# Altium PCB PCB1.PcbDoc
Units mm, origin at the board's own origin, x right, y up, seen from the top; angles counter-clockwise.
Board outline 40.39 x 54.1 mm, 2 copper layers (Top Layer, Bottom Layer); 13 components, 16 nets, 48 pads, 0 vias.
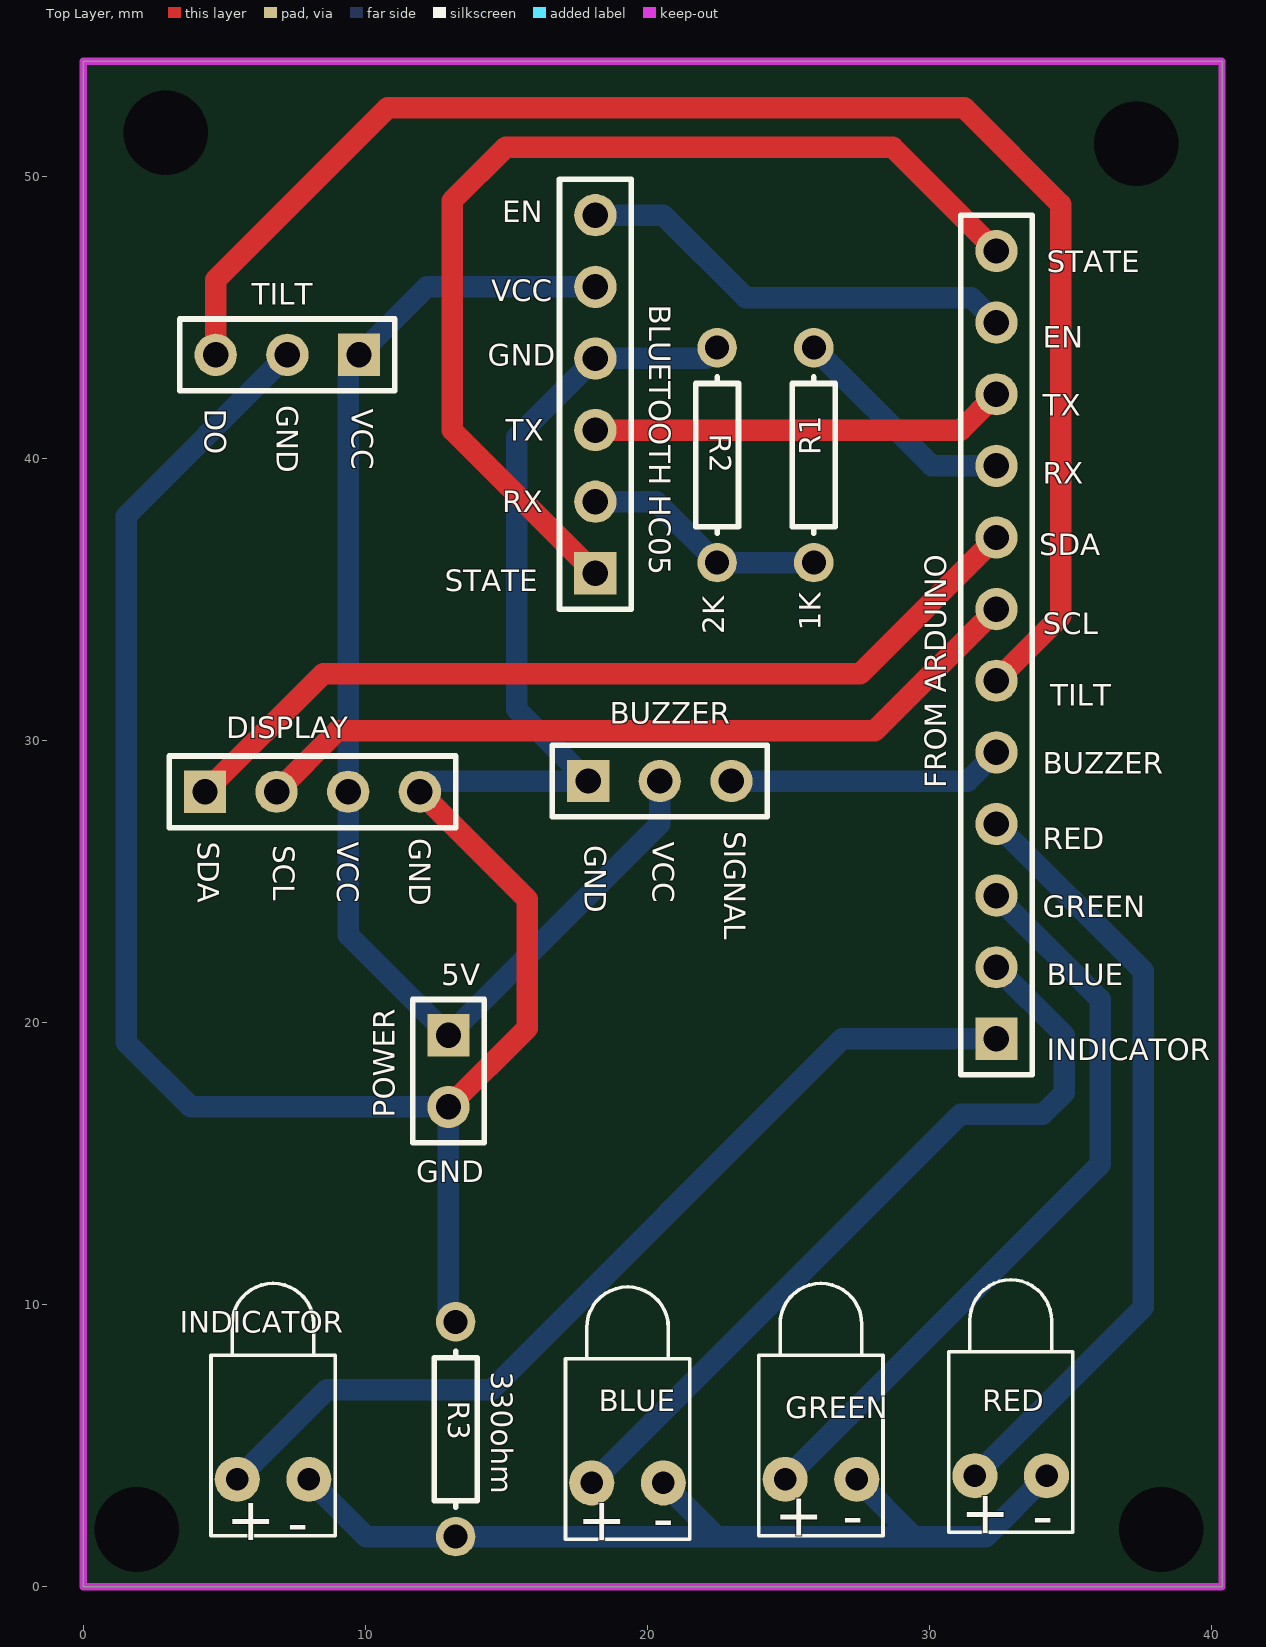
[diagram p0: Top Layer view]
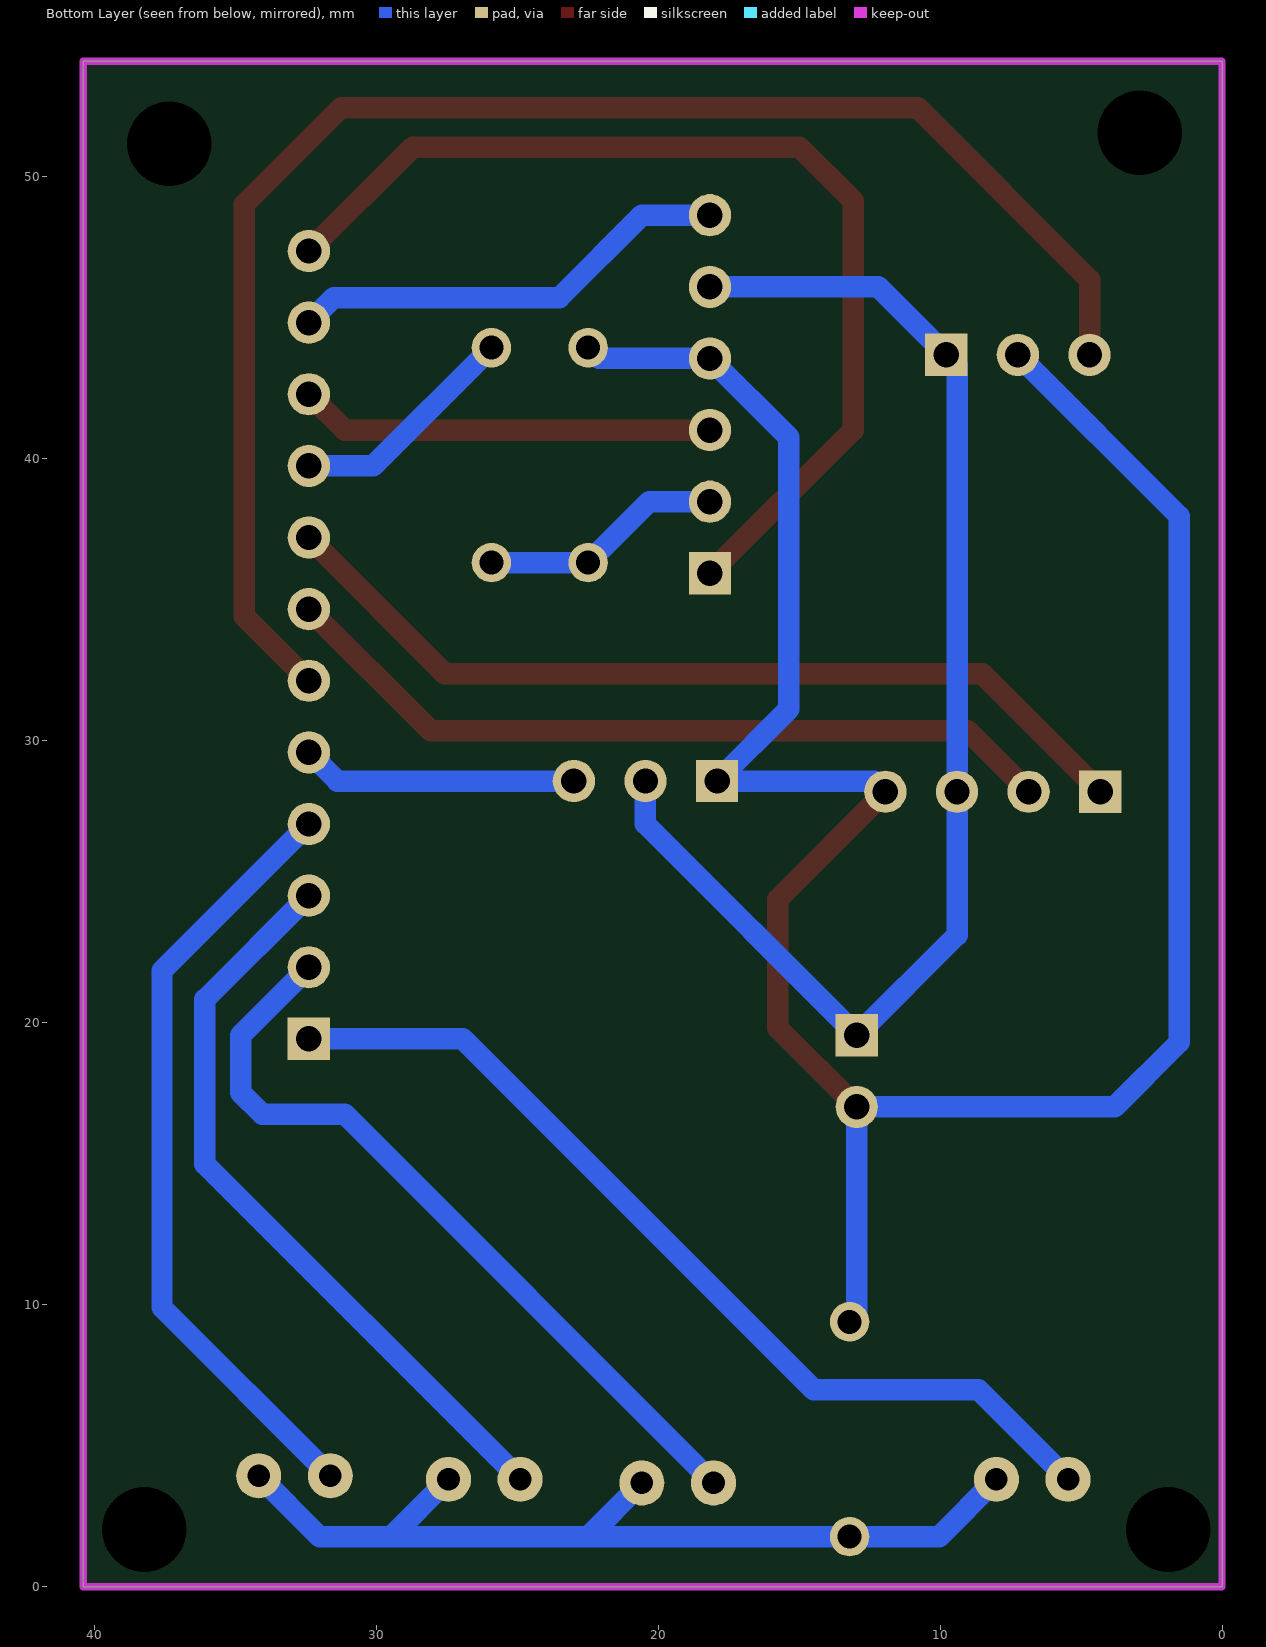
[diagram p1: Bottom Layer view, seen from below]

## Layer stack, top to bottom
Top Solder: solder mask 0.0102, Solder Resist, Dk 3.5
Top Layer: signal copper 0.0356
Dielectric 1: dielectric 0.32, FR-4, Dk 4.8
Bottom Layer: signal copper 0.0356
Bottom Solder: solder mask 0.0102, Solder Resist, Dk 3.5

## Board outline
0,0 40.386,0 40.386,54.102 0,54.102

## Design rules (kind name [scope] priority, off if disabled: settings)
Clearance [All] p1: gap=0.254 ignorepadtopadclearanceinfootprint=FALSE except(0: Arc-Hole Track-Hole SMDPad-Hole THPad-Hole Via-Hole Fill-Hole Poly-Hole Region-Hole Text-Hole)
PolygonConnect [All] p1: connectstyle=Relief reliefconductorwidth=0.254 reliefentries=4 polygonreliefangle="90 Angle" airgapwidth=0.254
RoutingVias [All] p1: holewidth=0.711 width=1.27 viastyle="Through Hole" minholewidth=0.711 minwidth=1.27 maxholewidth=0.711 maxwidth=1.27
SolderMaskExpansion [All] p1: expansion=0.102
Width [All] p1: maxlimit=1.27 minlimit=0.508 preferedwidth=0.762
30 further rules are at their usual default settings.

## Components (designator, comment, footprint, x,y, rotation, side; value= is the part's Value field where it differs from the comment)
BLUE "LED1" LED-1 19.304,3.683 r90 top
"BLUETOOTH HC05" "Header 6" HDR1X6 18.161,35.941 r90 top
BUZZER "Header 3" HDR1X3 17.907,28.575 r0 top
DISPLAY "Header 4" HDR1X4 4.318,28.194 r0 top
"FROM ARDUINO" "Header 12" HDR1X12 32.385,19.431 r90 top
GREEN "LED1" LED-1 26.162,3.81 r90 top
INDICATOR "LED1" LED-1 6.731,3.81 r90 top (schematic designator "POWER INDICATOR")
POWER "Header 2" HDR1X2 12.954,19.558 r270 top
R1 "Res1" AXIAL-0.3 25.908,40.132 r270 top value=1K
R2 "Res1" AXIAL-0.3 22.479,40.132 r90 top value=2K
R3 "Res1" AXIAL-0.3 13.208,5.588 r90 top value=330ohm
RED "LED1" LED-1 32.893,3.937 r90 top
TILT "Header 3" HDR1X3 9.779,43.688 r180 top

## Footprints (in the part's own frame and the unit in brackets; to place one, negate y for a bottom-side part, rotate by r counter-clockwise, add the part's x,y. Pads: shape width x height; smd on the part's side, far side on the other; paste and mask are expansions set on the pad)
AXIAL-0.3 [mm] "Axial Device, Thru-Hole; 2 Leads; 0.3 in Pin Spacing"
  round 1.4 hole 0.85: 1(-3.81,0) 2(3.81,0)
  silkscreen extent -2.77,-0.76 2.77,0.76
HDR1X2 [mm] "Connector; Header; 2 Position"
  rect 1.5x1.5 hole 0.9: 1(0,0)
  round 1.5 hole 0.9: 2(2.54,0)
  silkscreen extent -1.27,-1.27 3.81,1.27
HDR1X3 [mm] "Connector; Header; 3 Position"
  rect 1.5x1.5 hole 0.9: 1(0,0)
  round 1.5 hole 0.9: 2(2.54,0) 3(5.08,0)
  silkscreen extent -1.27,-1.27 6.35,1.27
HDR1X4 [mm] "Connector; Header; 4 Position"
  rect 1.5x1.5 hole 0.9: 1(0,0)
  round 1.5 hole 0.9: 2(2.54,0) 3(5.08,0) 4(7.62,0)
  silkscreen extent -1.27,-1.27 8.89,1.27
HDR1X6 [mm] "Connector; Header; 6 Position"
  rect 1.5x1.5 hole 0.9: 1(0,0)
  round 1.5 hole 0.9: 2(2.54,0) 3(5.08,0) 4(7.62,0) 5(10.16,0) 6(12.7,0)
  silkscreen extent -1.27,-1.27 13.97,1.27
HDR1X12 [mm] "Connector; Header; 12 Position"
  rect 1.5x1.5 hole 0.9: 1(0,0)
  round 1.5 hole 0.9: 2(2.54,0) 3(5.08,0) 4(7.62,0) 5(10.16,0) 6(12.7,0) 7(15.24,0) 8(17.78,0) 9(20.32,0) 10(22.86,0) 11(25.4,0) 12(27.94,0)
  silkscreen extent -1.27,-1.27 29.21,1.27
LED-1 [mm] "LED; 2 Leads"
  round 1.6 hole 0.8: 1(0,1.27) 2(0,-1.27)
  silkscreen extent -2,-2.2 6.95,2.2

## Part data
BLUE GREEN INDICATOR RED: "Typical RED GaAs LED", LatestRevisionDate=08-Jul-2005, LatestRevisionNote="Mech Layer 1 removed.", PackageDescription="LED; 2 Leads", PackageReference=LED-1, Published=8-Jun-2000, Publisher="Altium Limited"
"BLUETOOTH HC05": "Header, 6-Pin", LatestRevisionDate=17-Jul-2002, LatestRevisionNote="Re-released for DXP Platform.", Publisher="Altium Limited"
BUZZER TILT: "Header, 3-Pin", LatestRevisionDate=17-Jul-2002, LatestRevisionNote="Re-released for DXP Platform.", Publisher="Altium Limited"
DISPLAY: "Header, 4-Pin", LatestRevisionDate=17-Jul-2002, LatestRevisionNote="Re-released for DXP Platform.", Publisher="Altium Limited"
"FROM ARDUINO": "Header, 12-Pin", LatestRevisionDate=17-Jul-2002, LatestRevisionNote="Re-released for DXP Platform.", Publisher="Altium Limited"
POWER: "Header, 2-Pin", LatestRevisionDate=17-Jul-2002, LatestRevisionNote="Re-released for DXP Platform.", Publisher="Altium Limited"
R1 R2 R3: "Resistor", LatestRevisionDate=17-Jul-2002, LatestRevisionNote="Re-released for DXP Platform.", PackageDescription="Axial Device, Thru-Hole; 2 Leads; 0.3 in Pin Spacing", PackageReference=AXIAL-0.3, Published=8-Jun-2000, Publisher="Altium Limited"

## Free pads (board coordinates)
  round 1.524 hole 3: 2(2.921,51.562) 3(37.338,51.181) 4(1.905,2.032) 5(38.227,2.032)

## Nets (pads, with @x,y where several pads share a name; then routed paths per layer and width w, separated by ;. In a path a pad name is that pad's centre, name@x,y a point inside that pad or via, vN(x,y) a via of type N, cw(c..) or ccw(c..) an arc to the next point about the centre after c; other vN are vias at no path point)
GND: "BLUETOOTH HC05.4" BUZZER.1 DISPLAY.4 POWER.2 R2.2 R3.2 TILT.2 | length 88.6
  Top Layer w0.762: DISPLAY.4 15.748,24.384 15.748,19.812 POWER.2
  Bottom Layer w0.762: TILT.2 1.524,37.973 1.524,19.304 3.81,17.018 POWER.2 12.954,9.652 R3.2 ; DISPLAY.4 12.319,28.575 BUZZER.1 15.367,31.115 15.367,40.767 18.161,43.561 22.098,43.561 R2.2
NetBLUE_1: "FROM ARDUINO.2" BLUE.1 | length 27.9
  Bottom Layer w0.762: BLUE.1 31.115,16.764 34.036,16.764 34.798,17.526 34.798,19.558 32.385,21.971
NetBLUE_2: BLUE.2 GREEN.2 INDICATOR.2 R3.1 RED.2 | length 34
  Bottom Layer w0.762: INDICATOR.2 10.033,1.778 R3.1 22.479,1.778 ; BLUE.2 22.479,1.778 ; GREEN.2@27.432,3.937 GREEN.2 29.464,1.778 ; RED.2@34.163,4.318 RED.2 32.004,1.778 29.464,1.778 ; 22.479,1.778 29.464,1.778
"NetBLUETOOTH HC05_1": "BLUETOOTH HC05.1" "FROM ARDUINO.12" | length 36.9
  Top Layer w0.762: 18.161,35.941 13.081,41.021 13.081,49.149 14.986,51.054 28.702,51.054 32.385,47.371
"NetBLUETOOTH HC05_2": "BLUETOOTH HC05.2" R1.2 R2.1 | length 8.6
  Bottom Layer w0.762: 18.161,38.481 20.32,38.481 R2.1 R1.2
"NetBLUETOOTH HC05_3": "BLUETOOTH HC05.3" "FROM ARDUINO.10" | length 14.8
  Top Layer w0.762: 18.161,41.021 31.115,41.021 32.385,42.291
"NetBLUETOOTH HC05_6": "BLUETOOTH HC05.6" "FROM ARDUINO.11" | length 15.8
  Bottom Layer w0.762: 18.161,48.641 20.574,48.641 23.495,45.72 31.496,45.72 32.385,44.831
NetBUZZER_3: "FROM ARDUINO.5" BUZZER.3 | length 9.8
  Bottom Layer w0.762: BUZZER.3 31.369,28.575 32.385,29.591
NetDISPLAY_1: "FROM ARDUINO.8" DISPLAY.1 | length 31.8
  Top Layer w0.762: DISPLAY.1 8.509,32.385 27.559,32.385 32.385,37.211
NetDISPLAY_2: "FROM ARDUINO.7" DISPLAY.2 | length 28.2
  Top Layer w0.762: DISPLAY.2 9.017,30.353 28.067,30.353 32.385,34.671
"NetFROM ARDUINO_1": "FROM ARDUINO.1" INDICATOR.1 | length 33.4
  Bottom Layer w0.762: INDICATOR.1 8.636,6.985 14.478,6.985 26.924,19.431 32.385,19.431
"NetFROM ARDUINO_3": "FROM ARDUINO.3" GREEN.1 | length 26.9
  Bottom Layer w0.762: GREEN.1 36.068,14.986 36.068,20.828 32.385,24.511
"NetFROM ARDUINO_4": "FROM ARDUINO.4" RED.1 | length 27.7
  Bottom Layer w0.762: RED.1 37.592,9.906 37.592,21.844 32.385,27.051
"NetFROM ARDUINO_6": "FROM ARDUINO.6" TILT.3 | length 54.4
  Top Layer w0.762: TILT.3 4.699,46.355 10.795,52.451 31.242,52.451 34.671,49.022 34.671,34.417 32.385,32.131
"NetFROM ARDUINO_9": "FROM ARDUINO.9" R1.1 | length 8.2
  Bottom Layer w0.762: R1.1 30.099,39.751 32.385,39.751
VCC: "BLUETOOTH HC05.5" BUZZER.2 DISPLAY.3 POWER.1 TILT.1 | length 47.3
  Bottom Layer w0.762: 18.161,46.101 12.192,46.101 TILT.1 9.398,43.307 DISPLAY.3 9.398,23.114 POWER.1 20.447,27.051 BUZZER.2

## Keep-outs
Keep-Out Layer:
  the board outline again, w0.254

## Silkscreen, mask and mechanical layers (free items; w line width, h text height)
Top Overlay:
  text "EN" at 14.859,48.387 h0.76
  text "STATE" at 34.163,46.609 h0.76
  text "VCC" at 14.478,45.593 h0.76
  text "EN" at 34.036,43.942 h0.76
  text "GND" at 14.351,43.307 h0.76
  text "GND" at 6.858,41.91 h0.76 r270
  text "DO" at 4.318,41.783 h0.76 r270
  text "VCC" at 9.525,41.783 h0.76 r270
  text "TX" at 34.036,41.529 h0.76
  text "TX" at 14.986,40.64 h0.76
  text "RX" at 34.036,39.116 h0.76
  text "RX" at 14.859,38.1 h0.76
  text "SDA" at 33.909,36.576 h0.76
  text "STATE" at 12.827,35.306 h0.76
  text "1K" at 26.162,33.909 h0.76 r90
  text "2K" at 22.733,33.782 h0.76 r90
  text "SCL" at 34.036,33.782 h0.76
  text "TILT" at 34.29,31.242 h0.76
  text "BUZZER" at 34.036,28.829 h0.76
  text "SIGNAL" at 22.733,26.797 h0.76 r270
  text "GND" at 11.557,26.543 h0.76 r270
  text "SDA" at 4.064,26.416 h0.76 r270
  text "VCC" at 9.017,26.416 h0.76 r270
  text "VCC" at 20.193,26.416 h0.76 r270
  text "SCL" at 6.731,26.289 h0.76 r270
  text "GND" at 17.78,26.289 h0.76 r270
  text "RED" at 34.036,26.162 h0.76
  text "GREEN" at 34.036,23.749 h0.76
  text "5V" at 12.7,21.336 h0.76
  text "BLUE" at 34.163,21.336 h0.76
  text "INDICATOR" at 34.163,18.669 h0.76
  text "GND" at 11.811,14.351 h0.76
  text "330ohm" at 14.478,7.62 h0.76 r270
  text "+" at 31.115,1.905 h1.52
  text "+" at 24.511,1.81 h1.52
  text "-" at 26.924,1.778 h1.52
  text "-" at 33.655,1.778 h1.52
  text "-" at 20.193,1.683 h1.52
  text "+" at 5.08,1.651 h1.52
  text "+" at 17.526,1.651 h1.52
  text "-" at 7.239,1.524 h1.52